# Altium PCB PCB_YMF276 MegaMod AMP2_2021-11-01.pcbdoc
Units mil, origin at the board's own origin, x right, y up, seen from the top; angles counter-clockwise.
Board outline 5675 x 4275 mil, 2 copper layers (Top Layer, Bottom Layer); 27 components, 43 nets, 131 pads, 16 vias.
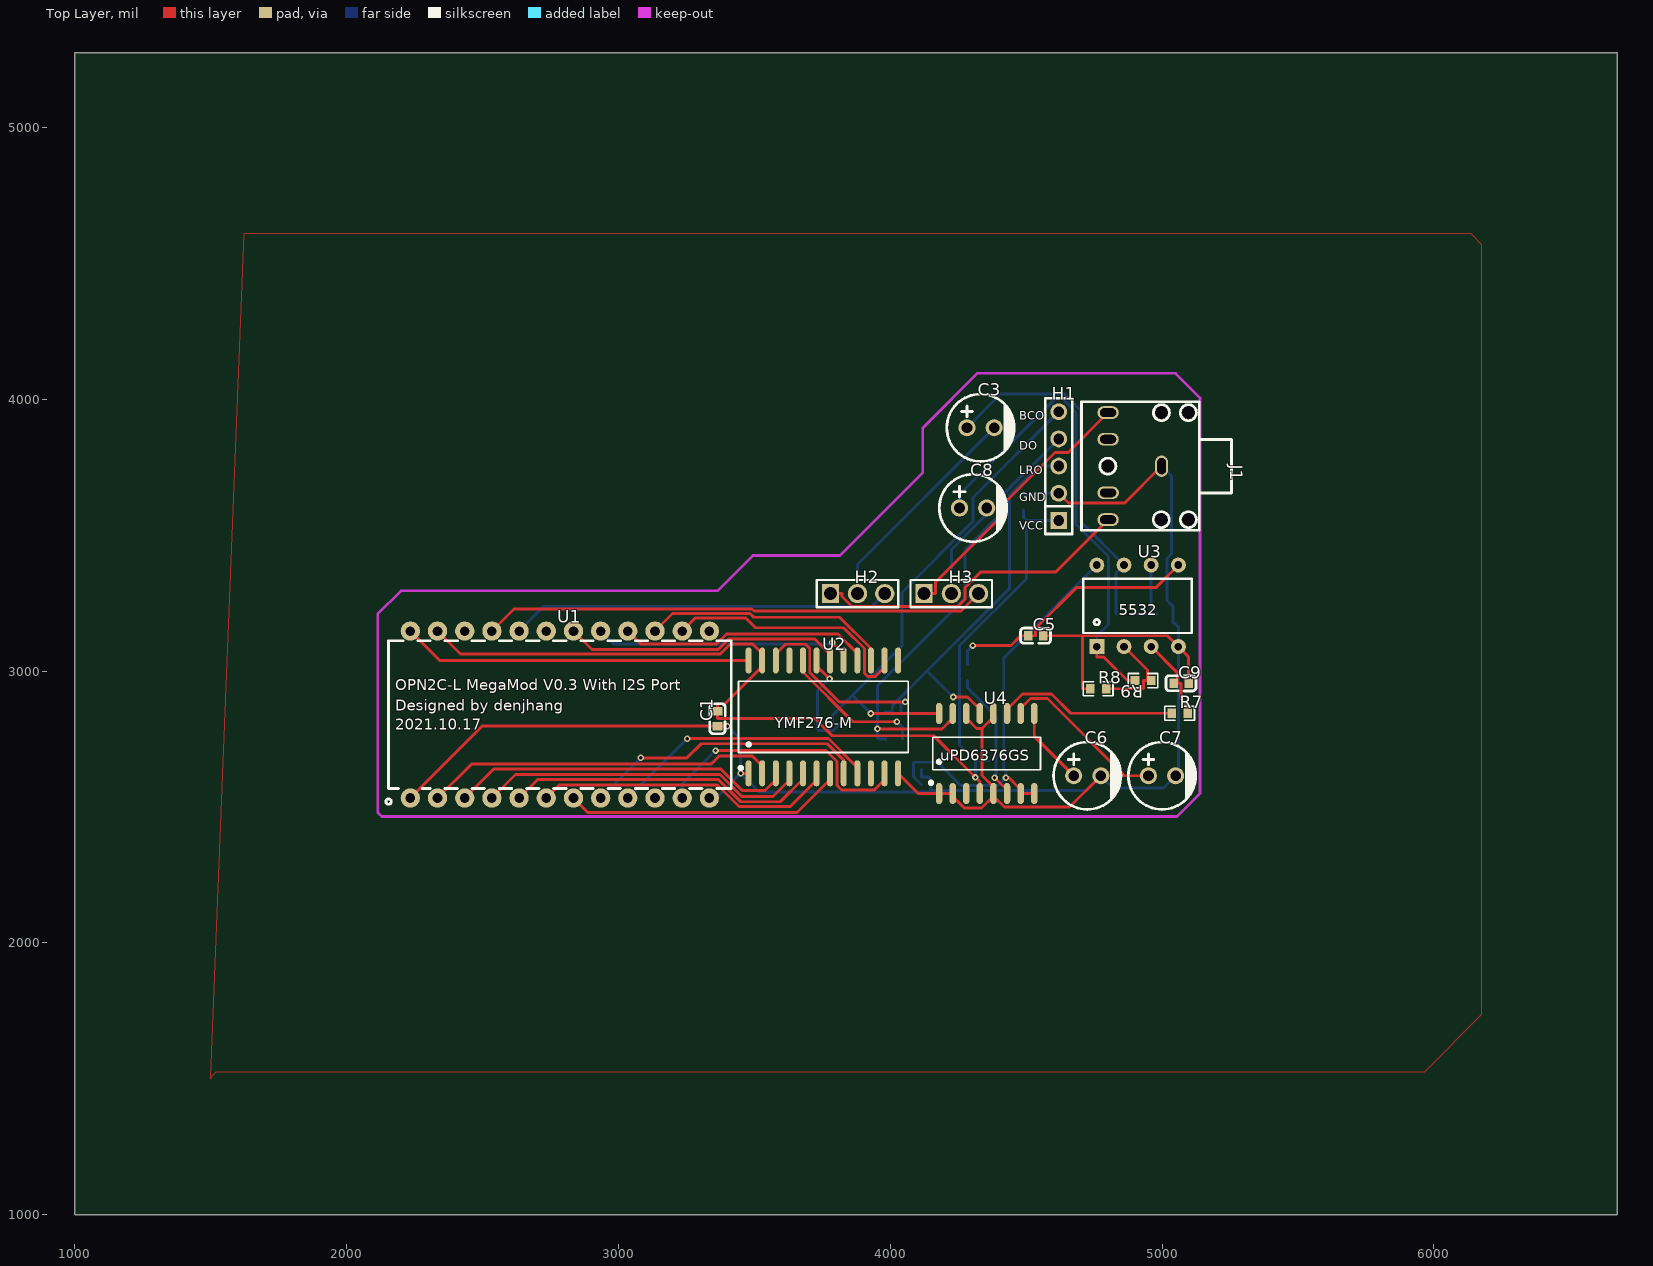
[diagram p0: Top Layer view]
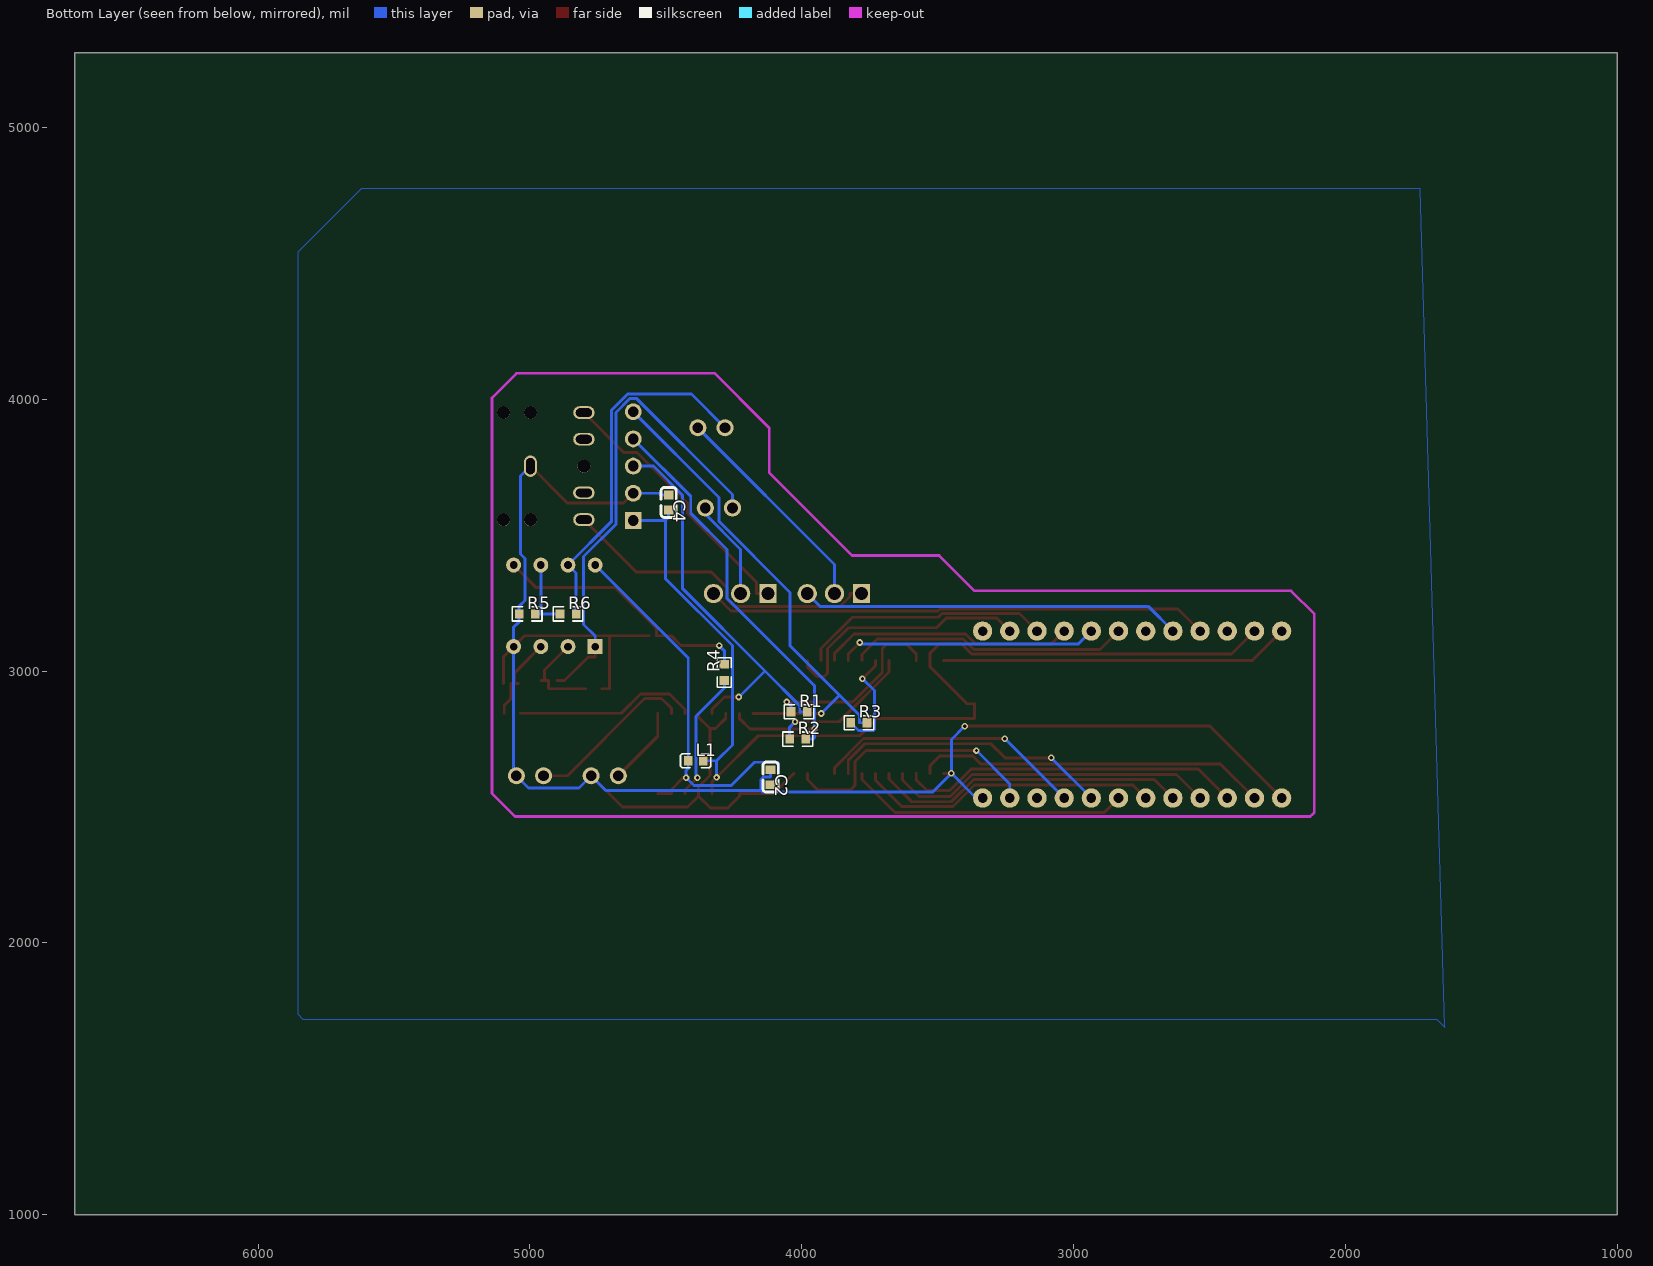
[diagram p1: Bottom Layer view, seen from below]

## Layer stack, top to bottom
Top Layer: signal copper (thickness not stored)
Dielectric: dielectric 12.6, FR-4, Dk 4.8
Bottom Layer: signal copper (thickness not stored)

## Board outline
6675,1000 1000,1000 1000,5275 6675,5275

## Components (designator, comment, footprint, x,y, rotation, side; value= is the part's Value field where it differs from the comment)
C1 "0.1u" C0603#1 3365,2825 r90 top
C2 "0.1u" C0603#2 4115,2610 r90 bottom
C3 "10uF" CAP-TH_BD6.3-P2.50-D1.0-FD 4332.5,3895 r0 top
C4 "0.1u" C0603#2 4490,3620 r90 bottom
C5 "1.5n" C0603#1 4535,3130 r0 top
C6 "47u" CAP-TH_BD6.3-P2.50-D1.0-FD 4725,2615 r0 top
C7 "47u" CAP-TH_BD6.3-P2.50-D1.0-FD 5000,2615 r0 top
C8 "10uF" CAP-TH_BD6.3-P2.50-D1.0-FD 4305,3600 r0 top
C9 "1.5n" C0603#1 5070,2955 r0 top
H1 "PM254V-11-05-H85" HDR-TH_5P-P2.54-V-F 4620,3754 r90 top
H2 "Header-Male-2.54_1x3" HDR-TH_3P-P2.54-V-M-1 3880,3285 r0 top
H3 "Header-Male-2.54_1x3" HDR-TH_3P-P2.54-V-M-1 4225,3285 r0 top
J1 "PJ-307C" AUDIO-TH_PJ307C 4900,3753.78 r270 top
L1 "100Ω" L0603 4390,2670 r0 bottom
R1 "10r" R0603#1 4010,2850 r0 bottom
R2 "10r" R0603#1 4015,2750 r0 bottom
R3 "10r" R0603#1 3790,2810 r0 bottom
R4 "7.5k" R0603#1 4285,2995 r270 bottom
R5 "10k" R0603#1 5010,3210 r0 bottom
R6 "4.7k" R0603#1 4860,3210 r0 bottom
R7 "7.5k" R0603#2 5065,2845 r0 top
R8 "10k" R0603#2 4765,2935 r0 top
R9 "4.7k" R0603#2 4930,2965 r180 top
U1 "MegaGRRL IC-FM" DIP-24_L32.0-W13.8-P2.54-LS15.6-BL 2785,2840 r0 top
U2 "YMF276-M" SOIC24-YMF276 3730,2850 r0 top
U3 "SA5532P" DIP8 4910,3240 r0 top
U4 "μPD6376GS" SOIC16-UPD6376 4355,2710 r0 top

## Footprints (in the part's own frame and the unit in brackets; to place one, negate y for a bottom-side part, rotate by r counter-clockwise, add the part's x,y. Pads: shape width x height; smd on the part's side, far side on the other; paste and mask are expansions set on the pad)
AUDIO-TH_PJ307C [mm]
  oval 2x1.2 hole 0.8 slot 1.5 at 0 deg: 1(0,2.5)
  oval 1.2x2 hole 0.8 slot 1.5 at 90 deg: 2(5,-2.5) 3(2.489,-2.5) 4(-2.511,-2.5) 5(-5,-2.5)
  round 1.2 hole 1.2 unplated: ""(-5,2.5) ""(-5,5) ""(0,-2.5) ""(5,2.5) ""(5,5)
  silkscreen extent -6.01,-4.99 5.99,9.03
C0603#1 [mm]
  rect 0.8x0.9 smd: 1(-0.7,0) 2(0.7,0)
  silkscreen extent -1.41,-0.71 1.39,0.72
C0603#2 [mm]
  rect 0.8x0.9 smd: 1(0.7,0) 2(-0.7,0)
  silkscreen extent -1.39,-0.72 1.41,0.71
CAP-TH_BD6.3-P2.50-D1.0-FD [mm]
  round 1.6 hole 1: 1(-1.27,0) 2(1.27,0)
  silkscreen extent -3.15,-3.15 3.17,3.15
DIP8 [mil]
  rect 55x55 hole 28: 1(-150,-150)
  round 55 hole 28: 2(-50,-150) 3(50,-150) 4(150,-150) 5(150,150) 6(50,150) 7(-50,150) 8(-150,150)
  silkscreen extent -200,-100 200,100
DIP-24_L32.0-W13.8-P2.54-LS15.6-BL [mm]
  round 1.8 hole 0.9: 1(-13.97,-7.8) 2(-11.43,-7.8) 3(-8.89,-7.8) 4(-6.35,-7.8) 5(-3.81,-7.8) 6(-1.27,-7.8) 7(1.27,-7.8) 8(3.81,-7.8) 9(6.35,-7.8) 10(8.89,-7.8) 11(11.43,-7.8) 12(13.97,-7.8) 13(13.97,7.8) 14(11.43,7.8) 15(8.89,7.8) 16(6.35,7.8) 17(3.81,7.8) 18(1.27,7.8) 19(-1.27,7.8) 20(-3.81,7.8) 21(-6.35,7.8) 22(-8.89,7.8) 23(-11.43,7.8) 24(-13.97,7.8)
  silkscreen extent -16.26,-8.38 16,6.9
HDR-TH_3P-P2.54-V-M-1 [mm]
  rect 1.575x1.8 hole 1.2: 1(-2.54,0)
  round 1.8 hole 1.2: 2(0,0) 3(2.54,0)
  silkscreen extent -3.81,-1.27 3.81,1.27
HDR-TH_5P-P2.54-V-F [mil]
  rect 62x62 hole 40.16: 1(-200,0)
  round 62 hole 40.16: 2(-100,0) 3(0,0) 4(100,0) 5(200,0)
  silkscreen extent -250,-50 250,50
L0603 [mm]
  rect 0.8x0.864 smd: 1(-0.7,0) 2(0.7,0)
  silkscreen extent -1.41,-0.67 1.42,0.65
R0603#1 [mil]
  rect 31.75x34.02 smd: 1(29.66,0) 2(-29.66,0)
  silkscreen extent -55,-26 55,26
R0603#2 [mil]
  rect 31.75x34.02 smd: 1(-29.65,0) 2(29.65,0)
  silkscreen extent -55,-26 55,26
SOIC16-UPD6376 [mil]
  oval 23.7x77.6 smd: 1(-175.12,-160.19) 2(-125.12,-160.19) 3(-75.12,-160.19) 4(-25.12,-160.19) 5(24.88,-160.19) 6(74.88,-160.19) 7(124.88,-160.19) 8(174.88,-160.19) 9(174.88,133.97) 10(124.88,133.97) 11(74.88,133.97) 12(24.88,133.97) 13(-25.12,133.97) 14(-75.12,133.97) 15(-125.12,133.97) 16(-175.12,133.97)
  silkscreen extent -211,-127 198,47
SOIC24-YMF276 [mm]
  oval 0.56x2.432 smd: 1(-6.37,-5.743) 2(-5.1,-5.743) 3(-3.83,-5.743) 4(-2.56,-5.743) 5(-1.29,-5.743) 6(-0.02,-5.743) 7(1.25,-5.743) 8(2.52,-5.743) 9(3.79,-5.743) 10(5.06,-5.743) 11(6.33,-5.743) 12(7.6,-5.743) 13(7.6,4.795) 14(6.33,4.795) 15(5.06,4.795) 16(3.79,4.795) 17(2.52,4.795) 18(1.25,4.795) 19(-0.02,4.795) 20(-1.29,4.795) 21(-2.56,4.795) 22(-3.83,4.795) 23(-5.1,4.795) 24(-6.37,4.795)
  silkscreen extent -7.31,-5.39 8.54,2.85

## Via types
v1: diameter 24.02, hole 12.01, Top Layer to Bottom Layer, 16 vias

## Nets (pads, with @x,y where several pads share a name; then routed paths per layer and width w, separated by ;. In a path a pad name is that pad's centre, name@x,y a point inside that pad or via, vN(x,y) a via of type N, cw(c..) or ccw(c..) an arc to the next point about the centre after c; other vN are vias at no path point)
+5V: C1.2 C4.2 H1.1 L1.1 U1.23 U2.23 U4.4 | length 3968.9
  Top Layer w10.63: U1.23 2419.46,3062.63 3374.77,3062.63 3412.41,3100.27 3494.01,3100.27 3529.21,3065.07 U2.23 3529.21,3016.77 3392.14,2879.7 3365,2879.7 C1.2 3365,2825.42 3723.34,2825.42 3786.82,2761.94 4160.52,2761.94 v1(4313.7,2608.76) 4329.88,2592.58 U4.4
  Bottom Layer w10.63: v1(4313.7,2608.76) 4313.7,2670 ; L1.1 4335.31,2670 4313.7,2670 ; C4.2 4490,3565.3 4501.3,3554 ; H1.1 4501.3,3554 ; 4313.7,2670 4255.35,2728.35 4255.35,3093.69 4501.3,3339.64 4501.3,3554
/CS: U1.14 U2.14 | length 945.5
  Top Layer w10.63: U1.14 3282.78,3194.87 3469.01,3194.87 3504.54,3159.34 3828.76,3159.34 3904.99,3083.11 3904.99,2992.25 3917.74,2979.5 3944.78,2979.5 3979.21,3013.93 U2.14
/IC: U1.11 U2.11 | length 996.9
  Top Layer w10.63: v1(3357.85,2707.69) 3763.99,2707.69 3804.22,2667.46 3804.22,2579.97 3821.18,2563.01 3941.39,2563.01 3979.21,2600.83 U2.11
  Bottom Layer w10.63: U1.11 3235,2584.84 v1(3357.85,2707.69)
/RD: U1.16 U2.16 | length 935
  Top Layer w10.63: U1.16 3081.82,3100.27 3361.64,3100.27 3397.99,3136.62 3808.33,3136.62 3879.21,3065.74 U2.16
/WR: U1.15 U2.15 | length 918.2
  Top Layer w10.63: U1.15 3199.51,3211.6 3484.29,3211.6 3497.91,3197.98 3813.78,3197.98 3929.21,3082.55 U2.15
A0: U1.17 U2.17 | length 956.9
  Top Layer w10.63: v1(3786.44,3105.12) 3829.21,3062.35 U2.17
  Bottom Layer w10.63: U1.17 2981.83,3100.26 3781.58,3100.26 v1(3786.44,3105.12)
A1: U1.18 U2.18 | length 1034
  Top Layer w10.63: U1.18 2902.72,3079.37 3367.84,3079.37 3406.16,3117.69 3722.77,3117.69 3779.21,3061.25 U2.18
A.VCC: C2.2 L1.2 U3.8 U4.7 U4.8 | length 1543.9
  Top Layer w10.63: v1(4425.61,2607.99) 4436.25,2607.99 4479.88,2564.36 U4.7 U4.8
  Bottom Layer w10.63: C2.2 4085.88,2611.56 4085.88,2661.6 4088.99,2664.71 4173.81,2664.71 4259.61,2578.91 4396.53,2578.91 v1(4425.61,2607.99) 4425.61,2633.56 4417.56,2641.61 L1.2 4417.56,3047.56 U3.8
BCO: H1.5 R3.2 U4.16 | length 1862.4
  Top Layer w10.63: v1(3928.3,2843.98) U4.16
  Bottom Layer w10.63: R3.2 3787.61,2810 3787.61,2837.27 3861.31,2910.97 ; v1(3928.3,2843.98) 3861.31,2910.97 ; H1.5 4305,3639 4305,3551.07 4043.46,3289.53 4043.46,3093.12 3861.31,2910.97
C3_2: C3.2 H2.2 | length 818.1
  Bottom Layer w10.63: H2.2 3880,3392.5 C3.2
C8_2: C8.2 H3.2 | length 368.8
  Bottom Layer w10.63: H3.2 4225,3447.4 4355,3577.4 C8.2
CH.L: H3.3 U1.21 | length 1853.7
  Top Layer w10.63: U1.21 2616.24,3228.33 3491.22,3228.33 3499.13,3220.42 4260.42,3220.42 H3.3
CH.R: H2.3 U1.20 | length 1402.1
  Bottom Layer w10.63: U1.20 2726.08,3238.17 3933.17,3238.17 H2.3
D0: U1.2 U2.2 | length 1300.6
  Top Layer w10.63: U1.2 2459.59,2657.5 3340.76,2657.5 3370.93,2687.67 3492.58,2687.67 3529.21,2651.04 U2.2
D1: U1.3 U2.3 | length 1261.8
  Top Layer w10.63: U1.3 2541.93,2639.84 3376.76,2639.84 3456.21,2560.39 3539.71,2560.39 3579.21,2599.89 U2.3
D2: U1.4 U2.4 | length 1212.5
  Top Layer w10.63: U1.4 2621.37,2619.28 3373.66,2619.28 3453.81,2539.13 3568.72,2539.13 3629.21,2599.62 U2.4
D3: U1.5 U2.5 | length 1162.5
  Top Layer w10.63: U1.5 2703.54,2601.45 3367.83,2601.45 3450.04,2519.24 3595.96,2519.24 3679.21,2602.49 U2.5
D4: U1.6 U2.6 | length 1111.6
  Top Layer w10.63: U1.6 2782.7,2580.61 3365.01,2580.61 3443.37,2502.25 3632.76,2502.25 3729.21,2598.7 U2.6
D5: U1.7 U2.7 | length 1038.5
  Top Layer w10.63: U1.7 2887.61,2480.3 3657.83,2480.3 3779.21,2601.68 U2.7
D6: U1.8 U2.8 | length 1050.4
  Top Layer w10.63: v1(3082.99,2680.9) 3253.18,2680.9 3305.07,2732.79 3768.65,2732.79 3829.21,2672.23 U2.8
  Bottom Layer w10.63: U1.8 v1(3082.99,2680.9)
D7: U1.9 U2.9 | length 1000.4
  Top Layer w10.63: v1(3253.52,2751.43) 3773.67,2751.43 3879.21,2645.89 U2.9
  Bottom Layer w10.63: U1.9 v1(3253.52,2751.43)
DO: H1.4 R2.2 U4.15 | length 1720.2
  Top Layer w10.63: v1(3953.07,2787.39) 4190.9,2787.39 4229.88,2826.37 U4.15
  Bottom Layer w10.63: R2.2 3958.08,2750 3953.07,2755.01 v1(3953.07,2787.39) 3953.07,2945.85 4275,3267.78 4275,3447.01 4408.73,3580.74 4408.73,3642.73 H1.4
GND: C1.1 C2.1 C4.1 C5.2 C6.2 C7.2 C9.2 H1.2 J1.1 R5.1 R8.1 U1.1 U1.12 U2.1 U2.12 U3.4 U4.1 U4.2 U4.5 U4.12 U4.14 | length 7417.8
  Top Layer w10.63: U1.1 2499.53,2797.44 C1.1 3394.11,2797.44 v1(3400.85,2797.44) ; v1(3449.91,2623.9) U2.1 ; U2.12 4103.31,2549.8 U4.1 U4.2 4229.88,2538.66 4272.58,2495.96 4336.16,2495.96 U4.5@4379.88,2539.68 ; U4.14 4279.88,2826.39 4318,2788.27 4338.11,2788.27 ; U4.12 4379.88,2830.04 4338.11,2788.27 ; C5.2 4576.13,3130 4708.08,3130 ; H1.2 4655.74,3618.26 4862.91,3618.26 J1.1 ; R8.1 4708.08,2935 4708.08,3130 ; C6.2 4659.6,2499.6 4419.96,2499.6 U4.5@4379.88,2539.68 ; C9.2 5097.56,3052.44 U3.4 5020,3130 4708.08,3130 ; 4338.11,2788.27 4338.11,2616.43 4379.88,2574.66 U4.5 U4.5@4379.88,2539.68
  Bottom Layer w10.63: U1.12 3358.92,2532.91 v1(3449.91,2623.9) ; v1(3400.85,2797.44) 3449.91,2748.38 v1(3449.91,2623.9) ; C2.1 4115,2610.42 4141.77,2610.42 4150.69,2601.5 4150.69,2562.29 ; C4.1 4519.11,3647.56 4525.55,3654 H1.2 ; J1.1 5035.01,3717.2 5035.01,3430.46 5018.76,3414.21 5018.76,3259.3 5039.66,3238.4 R5.1 5039.66,3195.8 5039.66,3181.6 5060,3161.26 U3.4 5060,2625 C7.2 5004.87,2569.87 4820.13,2569.87 C6.2 4720.9,2560.9 4152.08,2560.9 4150.69,2562.29 ; v1(3449.91,2623.9) 3518.52,2555.29 4143.69,2555.29 4150.69,2562.29
LO: R7.1 U4.11 | length 673
  Top Layer w10.63: U4.11 4429.88,2858.56 4487.05,2915.73 4593.7,2915.73 4664.43,2845 5008.08,2845 R7.1
LRO: H1.3 R1.2 U4.13 | length 1496.8
  Top Layer w10.63: v1(4231.59,2904.61) 4284.96,2904.61 4329.88,2859.69 U4.13
  Bottom Layer w10.63: R1.2 4007.61,2850 4007.61,2872.57 4135.62,3000.58 ; v1(4231.59,2904.61) 4135.62,3000.58 ; H1.3 4545.7,3754 4439.5,3647.8 4439.5,3304.46 4135.62,3000.58
MCLK: U1.24 U2.24 | length 1289.1
  Top Layer w10.63: U1.24 2343.31,3038.78 U2.24
OUT.L: H3.1 J1.5 | length 999
  Top Layer w10.63: H3.1 4167.39,3285 4167.39,3327.39 4420.32,3580.32 4420.32,3617.71 4606.61,3804 4654.95,3804 J1.5
OUT.R: H2.1 J1.2 | length 1205.2
  Top Layer w10.63: H2.1 3822.39,3285 3822.39,3274.4 3859.62,3237.17 4248.29,3237.17 4275,3263.88 4275,3306.74 4332.92,3364.66 4609.31,3364.66 J1.2
RO: R4.1 U4.6 | length 480.1
  Top Layer w10.63: v1(4384.08,2607.97) 4429.88,2562.17 U4.6
  Bottom Layer w10.63: R4.1 4285,2938.08 4389.59,2833.49 4389.59,2613.48 v1(4384.08,2607.97)
S$1199: 
S$6330: 
S$6332: 
U2_19: R3.1 U2.19 | length 391.8
  Top Layer w10.63: U2.19 3729.21,3019.87 v1(3777.06,2972.02)
  Bottom Layer w10.63: v1(3777.06,2972.02) 3733.07,2928.03 3733.07,2784.71 3736.18,2781.6 3791.26,2781.6 R3.1
U2_20: R2.1 U2.20 | length 535.3
  Top Layer w10.63: U2.20 3679.21,2996.57 3862.34,2813.44 v1(4024.71,2813.44)
  Bottom Layer w10.63: v1(4024.71,2813.44) 4044.65,2793.5 R2.1@4044.65,2750
U2_22: R1.1 U2.22 | length 700.9
  Top Layer w10.63: U2.22 3579.21,3062.51 3615.34,3098.64 3688.53,3098.64 3704.2,3082.97 3704.2,2995.24 3812.93,2886.51 v1(4055.01,2886.51)
  Bottom Layer w10.63: R1.1 4039.66,2878.4 4046.9,2878.4 v1(4055.01,2886.51)
U3_1: C8.1 R9.2 U3.1 | length 1788.7
  Top Layer w10.63: U3.1 4760,3051.11 4786.97,3051.11 4873.08,2965 R9.2
  Bottom Layer w10.63: C8.1 4255,3649.83 4607.08,4001.91 4633.66,4001.91 4683.96,3951.61 4683.96,3540.1 4802.58,3421.48 4802.58,3171.47 4760,3128.89 U3.1
U3_2: R8.2 R9.1 U3.2 | length 354
  Top Layer w10.63: R8.2 4929.66,2935 4932.39,2937.73 4932.39,2965 R9.1@4946.03,2965 ; U3.2 4946.03,3003.97 R9.1@4946.03,2965 ; R9.1 R9.1@4946.03,2965
U3_3: C9.1 R7.2 U3.3 | length 322.3
  Top Layer w10.63: U3.3 5056.01,2993.99 C9.1@5056.01,2955 ; C9.1 C9.1@5056.01,2955 ; R7.2 5094.66,2873.4 5069.58,2898.48 5069.58,2955 C9.1@5056.01,2955
U3_5: C5.1 R4.2 U3.5 | length 971.6
  Top Layer w10.63: v1(4304.18,3093.99) 4444.29,3093.99 4480.3,3130 C5.1 4534.58,3130 4534.58,3157.14 4684.24,3306.8 4976.8,3306.8 U3.5
  Bottom Layer w10.63: R4.2 4285,3074.81 v1(4304.18,3093.99)
U3_6: R5.2 R6.1 U3.6 | length 270.7
  Bottom Layer w10.63: R6.1@4889.65,3210 4960,3210 ; U3.6 4960,3210 ; R5.2 4960,3210
U3_7: C3.1 R6.2 U3.7 | length 1321.1
  Bottom Layer w10.63: C3.1 4406.14,4018.64 4640.59,4018.64 4700.69,3958.54 4700.69,3549.31 U3.7 4830.34,3360.34 R6.2
U4_9: C6.1 U4.9 | length 289.1
  Top Layer w10.63: U4.9 4529.88,2760.12 C6.1
U4_10: C7.1 U4.10 | length 621.8
  Top Layer w10.63: U4.10 4479.88,2863.27 4515.61,2899 4578.39,2899 4862.39,2615 C7.1
pads on no net: J1. J1.3 J1.4 U1.10 U1.13 U1.19 U1.22 U2.10 U2.13 U2.21 U4.3

## Polygon pours and split planes (outlines as drawn)
GND on Bottom Layer (solid): 1725,4775 5620,4775 5855,4540 5855,1740 5835,1720 1665,1720 1635,1690
GND on Top Layer (solid): 1500.21,1505.21 1500,1500 1500,1505 1500.21,1505.21
GND on Top Layer (solid): 1500.21,1505.21 1625,4610 6135,4610 6175,4570 6175,1735 5965,1525 1520,1525 1500.21,1505.21

## Silkscreen, mask and mechanical layers (free items; w line width, h text height)
Top Overlay:
  text "BCO" at 4475,3924.25 h31.5
  text "DO" at 4475,3814.25 h31.5
  text "LRO" at 4475,3724.25 h31.5
  text "GND" at 4475,3624.25 h31.5
  text "VCC" at 4475,3519.25 h31.5
  text "5532" at 4840,3204.68 h40.63
  text "OPN2C-L MegaMod V0.3 With I2S Port" at 2180,2929.68 h40.63
  text "Designed by denjhang" at 2180,2854.68 h40.63
  text "YMF276-M" at 3575,2789.68 h40.63
  text "2021.10.17" at 2180,2784.68 h40.63
  text "uPD6376GS" at 4185,2669.68 h40.63